# Altium PCB PCB1.PcbDoc
Units mil, origin at the board's own origin, x right, y up, seen from the top; angles counter-clockwise.
Board outline 6000 x 4000 mil, 2 copper layers (Top Layer, Bottom Layer); 69 components, 37 nets, 230 pads, 0 vias.
Unrouted connection lines stored in the file: 146.
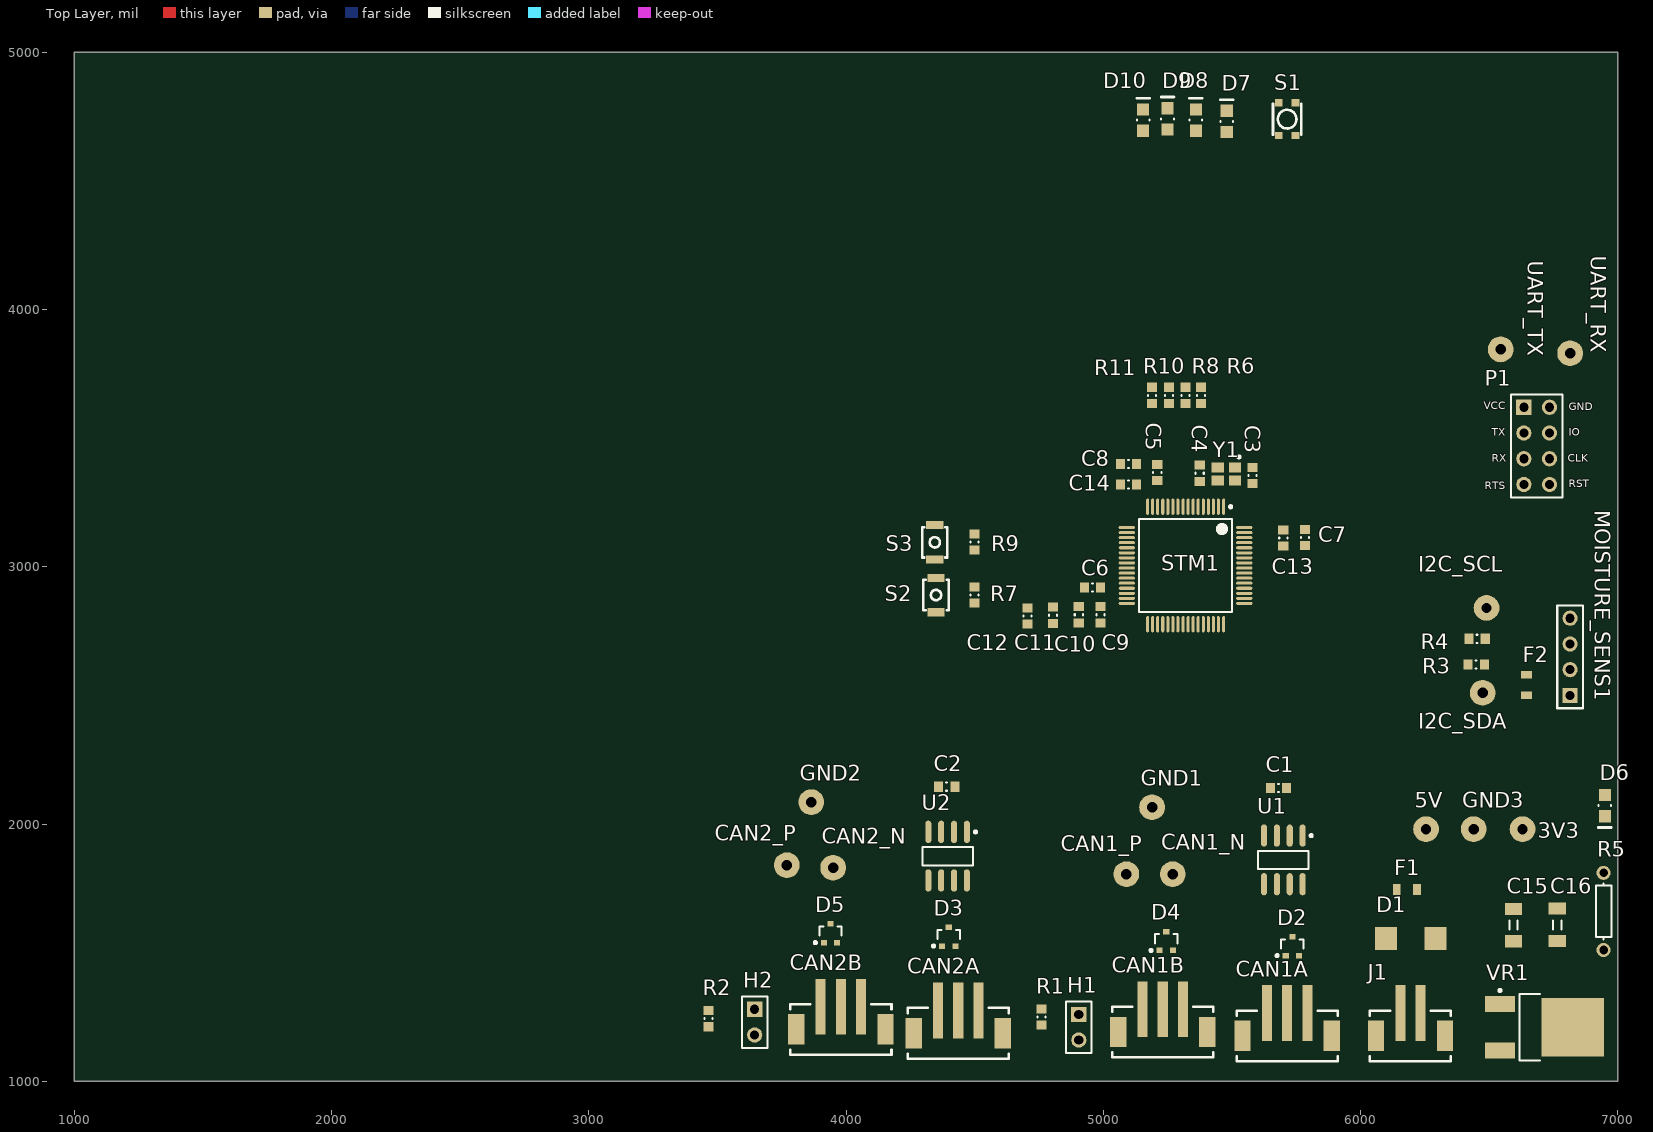
[diagram p0: Top Layer view]
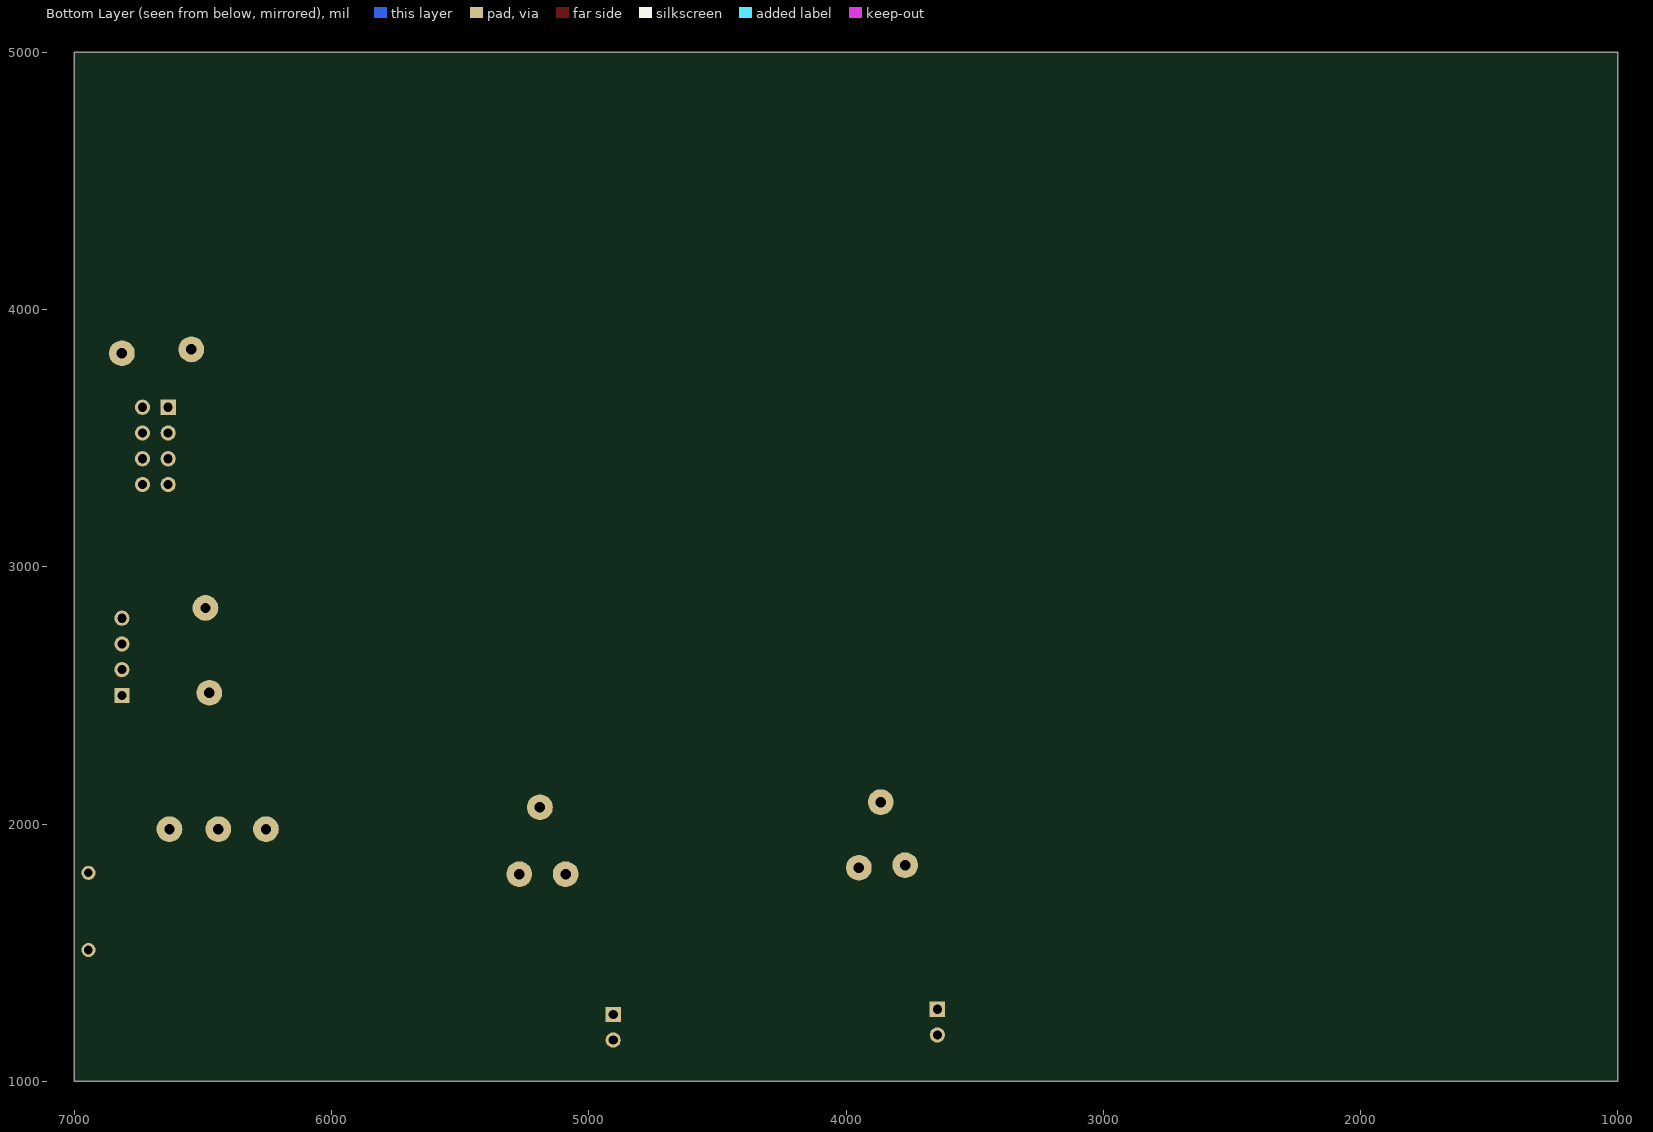
[diagram p1: Bottom Layer view, seen from below]

## Layer stack, top to bottom
Top Solder: solder mask 0.4, Solder Resist, Dk 3.5
Top Layer: signal copper 1.4
Dielectric 1: dielectric 12.6, FR-4, Dk 4.8
Bottom Layer: signal copper 1.4
Bottom Solder: solder mask 0.4, Solder Resist, Dk 3.5

## Board outline
1000,1000 7000,1000 7000,5000 1000,5000

## Design rules (kind name [scope] priority, off if disabled: settings)
BoardOutlineClearance [All] p1: gap=10 ignorepadtopadclearanceinfootprint=FALSE except(0: Arc-SplitContinuation Track-SplitContinuation SMDPad-SplitContinuation THPad-SplitContinuation Via-SplitContinuation Fill-SplitContinuation Poly-SplitContinuation Region-SplitContinuation Text-SplitContinuation)
Clearance [All] p1: gap=10 ignorepadtopadclearanceinfootprint=TRUE except(0: Arc-Hole Track-Hole SMDPad-Hole THPad-Hole Via-Hole Fill-Hole Poly-Hole Region-Hole Text-Hole; 6: Arc-Arc Arc-Track Arc-SMDPad Track-Track Track-SMDPad SMDPad-SMDPad)
HoleSize [All] p1: absolutevalues=TRUE maxlimit=244.09 minlimit=7.87 maxpercent=80.000 minpercent=20.000
MinimumAnnularRing [All] p1: minimumring=5.91
PolygonConnect [All] p1: connectstyle=Direct reliefconductorwidth=10 reliefentries=4 polygonreliefangle="90 Angle" airgapwidth=10
RoutingVias [All] p1: holewidth=16 width=28 viastyle="Through Hole" minholewidth=16 minwidth=28 maxholewidth=28 maxwidth=50
SolderMaskExpansion [All] p1: expansion=4
Width thicc [(InNet('-5V') OR InNet('+3V3') OR InNet('+5V'))] p1: maxlimit=20 minlimit=10 preferedwidth=15 minimp=50.000000 maximp=50.000000 favimp=50.000000
Width [All] p2: maxlimit=20 minlimit=4 preferedwidth=10 bottomlayer_minwidth=6 minimp=50.000000 maximp=50.000000 favimp=50.000000
29 further rules are at their usual default settings.

## Classes and differential pairs
component class Support: D7 D8 D9 D10 R6 R7 R8 R9 R10 R11 S2 S3
component class POWER: 3V3 5V C15 C16 D6 GND3 R5
component class MCU: C3 C4 C5 C6 C7 C8 C9 C10 C11 C12 C13 C14 I2C_SCL I2C_SDA R3 R4 S1 STM1 UART_RX UART_TX Y1
component class Connectors: CAN1A CAN1B CAN2A CAN2B D1 D2 D3 D4 D5 F1 F2 J1 MOISTURE_SENS1 P1
component class CAN: C1 C2 CAN1_N CAN1_P CAN2_N CAN2_P GND1 GND2 H1 H2 R1 R2 U1 U2

## Components (designator, comment, footprint, x,y, rotation, side; value= is the part's Value field where it differs from the comment)
3V3 "TESTPOINT_LOOP" TESTPOINT_LOOP 6630,1980 r180 top
5V "TESTPOINT_LOOP" TESTPOINT_LOOP 6255,1980 r180 top
C1 "CAP_0.1uF_16V_0603" CAPC0603(1608)55_N 5681.5,2140 r180 top value=0.1uF
C2 "CAP_0.1uF_16V_0603" CAPC0603(1608)55_N 4391.5,2145 r180 top value=0.1uF
C3 "CAP_15pF_0603" CAPC0603(1608)55_N 5580,3355 r90 top value=15pF
C4 "CAP_15pF_0603" CAPC0603(1608)55_N 5375,3363.5 r270 top value=15pF
C5 "CAP_0.1uF_16V_0603" CAPC0603(1608)55_N 5210,3366.5 r270 top value=0.1uF
C6 "CAP_4.7uF_0603" CAPC0603(1608)55_N 4958.5,2920 r0 top value=4.7uF
C7 "CAP_0.1uF_16V_0603" CAPC0603(1608)55_N 5785,3113.5 r90 top value=0.1uF
C8 "CAP_1uF_16V_0603" CAPC0603(1608)55_N 5098.5,3400 r0 top value=1uF
C9 "CAP_0.1uF_16V_0603" CAPC0603(1608)55_N 4990,2813.5 r90 top value=0.1uF
C10 "CAP_0.1uF_16V_0603" CAPC0603(1608)55_N 4905,2813.5 r90 top value=0.1uF
C11 "CAP_0.1uF_16V_0603" CAPC0603(1608)55_N 4805,2811.5 r90 top value=0.1uF
C12 "CAP_4.7uF_0603" CAPC0603(1608)55_N 4705,2808.5 r90 top value=4.7uF
C13 "CAP_0.1uF_16V_0603" CAPC0603(1608)55_N 5700,3111.5 r90 top value=0.1uF
C14 "CAP_10nF_0603" CAPC0603(1608)55_N 5098.5,3320 r0 top value=10nF
C15 "10uF" CAPC1206(3216) 6595,1607.01 r90 top
C16 "10uF" CAPC1206(3216) 6765,1607.99 r90 top
CAN1_N "TESTPOINT_LOOP" TESTPOINT_LOOP 5270,1805 r270 top
CAN1_P "TESTPOINT_LOOP" TESTPOINT_LOOP 5090,1805 r270 top
CAN1A "CON_3M_SM4" JST-B3B-SM4-TB 5715,1077.99 r0 top
CAN1B "CON_3M_SM4" JST-B3B-SM4-TB 5231.26,1092.99 r0 top
CAN2_N "TESTPOINT_LOOP" TESTPOINT_LOOP 3950,1830 r270 top
CAN2_P "TESTPOINT_LOOP" TESTPOINT_LOOP 3770,1840 r270 top
CAN2A "CON_3M_SM4" JST-B3B-SM4-TB 4436.26,1087.99 r0 top
CAN2B "CON_3M_SM4" JST-B3B-SM4-TB 3980,1102.99 r0 top
D1 "TVS_DIODE_BIDIRECTIONAL" TVS_DIODE_BIDIRECTIONAL 6195,1555 r0 top
D2 "TVS_DIODE_CAN" NXP-SOT323-3 5735,1525 r90 top
D3 "TVS_DIODE_CAN" NXP-SOT323-3 4399.41,1561.42 r90 top
D4 "TVS_DIODE_CAN" NXP-SOT323-3 5245,1545 r90 top
D5 "TVS_DIODE_CAN" NXP-SOT323-3 3940,1575 r90 top
D6 "DIO_LED_G" LED_0805_LINE 6950,2071.34 r270 top
D7 "DIO_LED_Y" LED_0805_LINE 5480,4731.34 r90 top
D8 "DIO_LED_G" LED_0805_LINE 5360,4736.34 r90 top
D9 "DIO_LED_G" LED_0805_LINE 5250,4741.34 r90 top
D10 "DIO_LED_G" LED_0805_LINE 5155,4736.34 r90 top
F1 "FUSE_2A_0603" FUSE_0603 6180.43,1745 r0 top
F2 "FUSE_250mA_0603" FUSE_0603 6645,2540.43 r90 top
GND1 "GND" TESTPOINT_LOOP 5190,2065 r270 top
GND2 "TESTPOINT_LOOP" TESTPOINT_LOOP 3865,2085 r270 top
GND3 "TESTPOINT_LOOP" TESTPOINT_LOOP 6440,1980 r270 top
H1 "JUMPER_2" HDR1X2 4905,1260 r270 top
H2 "JUMPER_2" HDR1X2 3645,1280 r270 top
I2C_SCL "TESTPOINT_LOOP" TESTPOINT_LOOP 6490,2840 r90 top
I2C_SDA "TESTPOINT_LOOP" TESTPOINT_LOOP 6475,2510 r180 top
J1 "CON_2M_SM4" JST-B2B-SM4-TB 6194.37,1077.99 r0 top
MOISTURE_SENS1 "Header 4" HDR1X4 6815,2500 r90 top
P1 "HEADER 4X2" HEADER_2X4 6635,3620 r270 top
R1 "RES_120R_0603" RESC0603(1608)_N 4760,1250 r90 top value=120R
R2 "RES_120R_0603" RESC0603(1608)_N 3465,1243.5 r90 top value=120R
R3 "RES_4K7_0603" RESC0603(1608)_N 6450,2620 r180 top value=4K7
R4 "RES_4K7_0603" RESC0603(1608)_N 6453.5,2720 r180 top value=4K7
R5 "Res1" AXIAL-0.3 6945,1660 r270 top value=100R
R6 "RES_100R_0603" RESC0603(1608)_N 5380,3666.5 r90 top value=100R
R7 "RES_10K_0603" RESC0603(1608)_N 4500,2890 r90 top value=10K
R8 "RES_100R_0603" RESC0603(1608)_N 5320,3666.5 r90 top value=100R
R9 "RES_10K_0603" RESC0603(1608)_N 4500,3096.5 r270 top value=10K
R10 "RES_100R_0603" RESC0603(1608)_N 5255,3666.5 r90 top value=100R
R11 "RES_100R_0603" RESC0603(1608)_N 5190,3666.5 r90 top value=100R
S1 "SW_PWR" PTS830GM140 5715,4740 r270 top
S2 "SW_TACTILE" B3U-1100P 4350,2890 r270 top
S3 "SW_TACTILE" B3U-1100P 4345,3095 r270 top
STM1 "STM32F446RET6" STM-LQFP64_L 5320,3005 r270 top
U1 "IC TXRX CAN" LT-S8_N 5700,1860.51 r270 top
U2 "IC TXRX CAN" LT-S8_N 4395,1875 r270 top
UART_RX "TESTPOINT_LOOP" TESTPOINT_LOOP 6815,3830 r90 top
UART_TX "TESTPOINT_LOOP" TESTPOINT_LOOP 6545,3845 r90 top
VR1 "5V0_3V3_LDO" VOLTAGE_REGULATOR 6652.17,1210 r270 top
Y1 "CRYSTAL_32MHZ" AVX-CX2520DB32000D0GEJZ1-4_V 5478.46,3360.59 r270 top

## Footprints (in the part's own frame and the unit in brackets; to place one, negate y for a bottom-side part, rotate by r counter-clockwise, add the part's x,y. Pads: shape width x height; smd on the part's side, far side on the other; paste and mask are expansions set on the pad)
AVX-CX2520DB32000D0GEJZ1-4_V [mm] "Hand Drawn, 4-Leads,Body 2.5x2mm"
  rect 1x1.2 smd: 1(-0.65,0.85) 2(-0.65,-0.85) 3(0.65,-0.85) 4(0.65,0.85)
  silkscreen extent -1.82,1.13 -1.58,1.38, body extent -1,-1.25 1,1.25, height 0.55
AXIAL-0.3 [mm] "Axial Device, Thru-Hole; 2 Leads; 0.3 in Pin Spacing"
  round 1.4 hole 0.85: 1(-3.81,0) 2(3.81,0)
  silkscreen extent -2.77,-0.76 2.77,0.76
B3U-1100P [mm] "TACTILE SWITCH GREY"
  rect 0.8x1.7 smd: 1(-1.7,0) 2(1.7,0)
  silkscreen extent -1.5,-1.25 1.5,1.25, body extent -2,-1.25 2,1.25, height 1.6
CAPC0603(1608)55_N [mm] "Chip Capacitor, Body 1.6x0.8mm, Height 0.55mm, IPC Medium Density"
  rect 0.9x1 smd: 1(-0.8,0) 2(0.8,0)
  silkscreen extent -0.05,-0.4 0.05,0.4, body extent -0.87,-0.48 0.88,0.47, height 0.55
CAPC1206(3216) [mm] "Chip Capacitor, Body 3.2x1.6mm, Height 0.55mm, IPC Medium Density"
  rect 1.2x1.7 smd: 1(-1.6,0) 2(1.6,0)
  silkscreen extent -0.45,-0.4 0.45,0.4, body extent -1.6,-0.85 1.6,0.85, height 1.75
FUSE_0603 [mm] "Chip Fuse, Body 1.6x0.81mm"
  rect 0.762x1.09 smd: 1(-1.005,0) 2(1.005,0)
  body extent -0.8,-0.38 0.8,0.38, height 0.75
HDR1X2 [mm] "Connector; Header; 2 Position"
  rect 1.5x1.5 hole 0.9: 1(0,0)
  round 1.5 hole 0.9: 2(2.54,0)
  silkscreen extent -1.27,-1.27 3.81,1.27, body extent -1.27,-1.27 3.81,1.27, height 6.35
HDR1X4 [mm] "Connector; Header; 4 Position"
  rect 1.5x1.5 hole 0.9: 1(0,0)
  round 1.5 hole 0.9: 2(2.54,0) 3(5.08,0) 4(7.62,0)
  silkscreen extent -1.27,-1.27 8.89,1.27
HEADER_2X4 [mm]
  rect 1.5x1.5 hole 0.9: 1(0,0)
  round 1.5 hole 0.9: 2(2.54,0) 3(5.08,0) 4(7.62,0) 5(0,2.54) 6(2.54,2.54) 7(5.08,2.54) 8(7.62,2.54)
  silkscreen extent -1.27,-1.27 8.89,3.81, body extent -1.36,-1.32 8.8,3.67, height 8.54
JST-B2B-SM4-TB [mm]
  rect 1x5.5 smd: 1(-1,4.75) 2(1,4.75)
  rect 1.6x3 smd: 3(-3.4,2.5) 4(3.4,2.5)
  silkscreen extent -4,0 4,5, body extent -3.97,0 3.97,7, height 6.6
JST-B3B-SM4-TB [mm]
  rect 1x5.5 smd: 1(-2,4.75) 2(0,4.75) 3(2,4.75)
  rect 1.6x3 smd: 4(-4.4,2.5) 5(4.4,2.5)
  silkscreen extent -5,0 5,5, body extent -4.97,0 4.97,7, height 6.6
LED_0805_LINE [mm] "SMD, 2-Leads, Body 2x1.25mm"
  rect 1.2x1.2 smd: 1(-1.05,0) 2(1.05,0)
  silkscreen extent -0.05,-0.63 2.16,0.64, body extent -1,-0.63 1,0.63, height 0.8
LT-S8_N [mm] "SOP, 8-Leads, Body 4.9x3.9mm, Pitch 1.27mm, IPC Medium Density"
  oval 2.2x0.6 smd: 1(-2.4,1.905) 2(-2.4,0.635) 3(-2.4,-0.635) 4(-2.4,-1.905) 5(2.4,-1.905) 6(2.4,-0.635) 7(2.4,0.635) 8(2.4,1.905)
  silkscreen extent -2.52,-2.5 0.9,2.88, body extent -2,-2.5 2,2.5, height 1.76
NXP-SOT323-3 [mm] "SOT23, 3-Leads, Body 2.2x1.35mm, Pitch 0.65mm"
  rect 0.55x0.6 smd paste-1: 1(-0.925,0.65) 2(-0.925,-0.65) 3(0.925,0)
  silkscreen extent -1.05,-1.1 0.67,1.62, body extent -1.15,-1.1 1.15,1.1, height 1.1
PTS830GM140 [mm] "PWR TACTILE SWITCH (RED)"
  rect 0.7x0.75 smd: 1(-1.625,0.825) 2(1.625,0.825) 3(-1.625,-0.825) 4(1.625,-0.825)
  silkscreen extent -1.53,-1.4 1.53,1.4, body extent -1.75,-1.3 1.75,1.3, height 1.35
RESC0603(1608)_N [mm] "Chip Resistor, Body 1.6x0.8mm, IPC Medium Density"
  rect 0.9x1 smd: 1(-0.8,0) 2(0.8,0)
  silkscreen extent -0.05,-0.4 0.05,0.4, body extent -0.85,-0.47 0.85,0.47, height 0.6
STM-LQFP64_L [mm] "QFP, 64-Leads, Body 10x10mm, Pitch 0.5mm, IPC High Density"
  oval 1.6x0.3 smd: 1(-5.8,3.75) 2(-5.8,3.25) 3(-5.8,2.75) 4(-5.8,2.25) 5(-5.8,1.75) 6(-5.8,1.25) 7(-5.8,0.75) 8(-5.8,0.25) 9(-5.8,-0.25) 10(-5.8,-0.75) 11(-5.8,-1.25) 12(-5.8,-1.75) 13(-5.8,-2.25) 14(-5.8,-2.75) 15(-5.8,-3.25) 16(-5.8,-3.75) 33(5.8,-3.75) 34(5.8,-3.25) 35(5.8,-2.75) 36(5.8,-2.25) 37(5.8,-1.75) 38(5.8,-1.25) 39(5.8,-0.75) 40(5.8,-0.25) 41(5.8,0.25) 42(5.8,0.75) 43(5.8,1.25) 44(5.8,1.75) 45(5.8,2.25) 46(5.8,2.75) 47(5.8,3.25) 48(5.8,3.75)
  oval 0.3x1.6 smd: 17(-3.75,-5.8) 18(-3.25,-5.8) 19(-2.75,-5.8) 20(-2.25,-5.8) 21(-1.75,-5.8) 22(-1.25,-5.8) 23(-0.75,-5.8) 24(-0.25,-5.8) 25(0.25,-5.8) 26(0.75,-5.8) 27(1.25,-5.8) 28(1.75,-5.8) 29(2.25,-5.8) 30(2.75,-5.8) 31(3.25,-5.8) 32(3.75,-5.8) 49(3.75,5.8) 50(3.25,5.8) 51(2.75,5.8) 52(2.25,5.8) 53(1.75,5.8) 54(1.25,5.8) 55(0.75,5.8) 56(0.25,5.8) 57(-0.25,5.8) 58(-0.75,5.8) 59(-1.25,5.8) 60(-1.75,5.8) 61(-2.25,5.8) 62(-2.75,5.8) 63(-3.25,5.8) 64(-3.75,5.8)
  silkscreen extent -5.92,-4.6 4.6,4.6, body extent -5,-5 5,5, height 1.6
TESTPOINT_LOOP [mm]
  round 2.54 hole 1.02: 1(0,0)
  body extent -1.27,-1.27 1.27,1.27, height 4.57
TVS_DIODE_BIDIRECTIONAL [mm]
  rect 2.16x2.26 smd: 1(-2.45,0) 2(2.45,0)
  body extent -2.7,-1.8 2.7,1.8, height 2.27
VOLTAGE_REGULATOR [mm] "DPAK, 3-Leads, Body 6.095x6.54mm, Pitch 4.57mm"
  rect 1.6x3 smd: 1(-2.285,-2.79) 3(2.285,-2.79)
  rect 5.8x6.2 smd: 2(0,4.39)
  silkscreen extent -3.76,-2.91 3.27,1.14, body extent -3.27,-0.84 3.27,5.25, height 2.38

## Part data
3V3 5V CAN1_N CAN1_P CAN2_N CAN2_P GND2 GND3 I2C_SCL I2C_SDA UART_RX UART_TX: "Loop testpoint through-hole pad", Manufacturer="Keystone Electronics", Manufacturer Part Number 1=5002, Supplier Part Number 1=36-5002-ND, Supplier 1=Digi-Key
C1 C2 C5 C7 C9 C10 C11 C13: "CAP CER 0.1UF 16V X7R 0603", Manufacturer=Yageo, MPN=CC0603KRX7R7BB104, Package="0603 (1608 Metric)", Supplier Part Number 1=311-1088-1-ND, Temperature Coefficient=X7R, Voltage Rating=16V, Dimensions="0.063\" L x 0.031\" W (1.60mm x 0.80mm)", Supplier 1=Digi-Key
C3 C4: "CAP CER 15PF 250V NPO 0603", Manufacturer=Yageo, MPN=AC0603JRNPOYBN150, Package="0603 (1608 Metric)", Supplier Part Number 1=311-3282-1-ND, Temperature Coefficient=NP0, Voltage Rating=250V, Dimensions="0.063\" L x 0.031\" W (1.60mm x 0.80mm)", Supplier 1=Digi-Key
C6 C12: "CAP CER 4.7UF 6.3V X5R 0603", Manufacturer=Yageo, MPN=CC0603KRX5R5BB475, Package="0603 (1608 Metric)", Supplier Part Number 1=311-1521-1-ND, Temperature Coefficient=X5R, Voltage Rating=6.3V, Dimensions="0.063\" L x 0.031\" W (1.60mm x 0.80mm)", Supplier 1=Digi-Key
C8: "CAP CER 1UF 16V Y5V 0603", Manufacturer=Yageo, MPN=CC0603ZRY5V7BB105, Package="0603 (1608 Metric)", Supplier Part Number 1=311-1372-1-ND, Temperature Coefficient=Y5V, Voltage Rating=16V, Dimensions="0.063\" L x 0.031\" W (1.60mm x 0.80mm)", Supplier 1=Digi-Key
C14: "CAP CER 10000PF 16V X7R 0603", Manufacturer=Yageo, MPN=CC0603KRX7R7BB103, Package="0603 (1608 Metric)", Supplier Part Number 1=311-3369-1-ND, Temperature Coefficient=X7R, Voltage Rating=16V, Dimensions="0.063\" L x 0.031\" W (1.60mm x 0.80mm)", Supplier 1=Digi-Key
C15 C16: library part CAP_10uF_50V_1206, "CAP CER 10UF 50V X5R 1206", Manufacturer=Murata, MPN=GRT31CR61H106KE01L, Package="1206 (3216 Metric)", Supplier Part Number 1=490-12456-1-ND, Voltage Rating=50V, Dimensions="0.126\" L x 0.063\" W (3.20mm x 1.6mm)", Supplier 1=Digi-Key
CAN1A CAN1B CAN2A CAN2B: Manufacturer=JST, Manufacturer Part Number=B3B-PH-SM4-TB(LF)(SN), Max Current Rating=2A, Max Voltage Rating=100V, Supplier Part Number 1=455-1735-1-ND, ComponentLink1Description=https://datasheet.ciiva.com/11747/0900766b80ddea81-11747684.pdf?src-supplier=RSComponents, ComponentLink1URL=https://datasheet.ciiva.com/11747/0900766b80ddea81-11747684.pdf?src-supplier=RSComponents, Pitch=2mm, Supplier 1=Digi-Key
D1: "TVS DIODE 5V 9.2V DO214AA", Breakdown Voltage=6.4V, Case/Package=SMB, Clamping Voltage=9.2V, Leakage Current=1.6mA, Manufacturer="Nexperia USA Inc.", Manufacturer 1=Littelfuse, Manufacturer Part Number 1=SMBJ5.0CA, Max Breakdown Voltage=7V, Max Operating Temperature=150°C, Max Power Dissipation=5W, Max Surge Current=65.3A, Min Operating Temperature=-65°C, MPN=PESD2CAN,215, Operating Supply Voltage=5V, Package="SC-70, SOT-323", Package Quantity=3000, Peak Pulse Power=600W, Power Line Protection=No, Supplier Part Number 1=1727-3891-1-ND, Test Current=10mA, ComponentLink1Description=Datasheet, ComponentLink1URL=https://www.littelfuse.com/~/media/electronics/datasheets/tvs_diodes/littelfuse_tvs_diode_smbj_datasheet.pdf.pdf, Composition=Zener, Direction=Bidirectional, Element Configuration=Single, ESD Protection=Yes, Height=0.096inch, Lead Free="Lead Free", Length=0.179inch, Max Reverse Leakage Current=1.6mA, Min Breakdown Voltage=6.4V, Mount="Surface Mount", Number of Bidirectional Channels=1, Number of Channels=1, Number of Elements=1, Number of Pins=2, Packaging="Tape and Reel", Peak Pulse Current=65.3A, Polarity=Bidirectional, Power Dissipation=600W, Pricing 1="1=0.39000, 10=0.31300, 25=0.28640, 100=0.17980, 250=0.17784, 500=0.16650, 1000=0.11322 (USD)", Radiation Hardening=No, REACH SVHC="No SVHC", Reverse Breakdown Voltage=6.4V, Reverse Standoff Voltage=5V, Stock 1=23233, Supplier 1=Digi-Key, Termination=SMD/SMT, Voltage Rating (DC)=5V, Width=0.155inch
D2 D3 D4 D5: "TVS DIODE 24V 41V SOT323-3", Manufacturer="Nexperia USA Inc.", Manufacturer Part Number=PESD2CAN,215, Package="SC-70, SOT-323", Supplier Part Number 1=1727-3891-1-ND, ComponentLink1Description=Datasheet, ComponentLink1URL=https://assets.nexperia.com/documents/data-sheet/PESD1CAN-U.pdf, Supplier 1=Digi-Key
D6 D8 D9 D10: "LED GREEN DIFFUSED 0805 SMD", Forward Voltage Drop=2.2V, Manufacturer=OSRAM, MPN="LG R971-KN-1", Package="0805 (2012 Metric)", Supplier Part Number 1=475-1410-1-ND, Supplier 1=Digi-Key
D7: "LED YELLOW DIFFUSED 0805 SMD", Forward Voltage Drop=2.2V, Manufacturer=OSRAM, MPN="LY R976-PS-36", Package="0805 (2012 Metric)", Supplier Part Number 1=475-2560-1-ND, Supplier 1=Digi-Key
F1: "FUSE SMD 2A 32V", Current Rating=2A, Supplier Part Number 1=F7132CT-ND, Voltage Rating (AC)=32V, ComponentLink1Description=https://datasheet.ciiva.com/303/467-303400.pdf?src-supplier=Digi-Key, ComponentLink1URL=https://datasheet.ciiva.com/303/467-303400.pdf?src-supplier=Digi-Key, ComponentLink2Description=http://datasheet.octopart.com/0467002.NRHF-Littelfuse-datasheet-32023482.pdf?src-supplier=Future+Electronics, ComponentLink2URL=http://datasheet.octopart.com/0467002.NRHF-Littelfuse-datasheet-32023482.pdf?src-supplier=Future+Electronics, ComponentLink3Description=http://datasheet.octopart.com/0467002.NRHF-Littelfuse-datasheet-136509808.pdf?src-supplier=Future+Electronics, ComponentLink3URL=http://datasheet.octopart.com/0467002.NRHF-Littelfuse-datasheet-136509808.pdf?src-supplier=Future+Electronics, Mount="Surface Mount", Supplier 1=Digi-Key, Supplier Packaging 1="Cut Tape", Voltage Rating (DC)=32V
F2: "FUSE SMD 250mA 32V", Current Rating=250mA, Supplier Part Number 1=F6020CT-ND, Voltage Rating (AC)=32V, ComponentLink1Description=https://datasheet.ciiva.com/303/467-303396.pdf?src-supplier=Digi-Key, ComponentLink1URL=https://datasheet.ciiva.com/303/467-303396.pdf?src-supplier=Digi-Key, ComponentLink2Description=https://datasheet.ciiva.com/18652/littelfuse-fuse-467-datasheet-pdf-18652490.pdf?src-supplier=Digi-Key, ComponentLink2URL=https://datasheet.ciiva.com/18652/littelfuse-fuse-467-datasheet-pdf-18652490.pdf?src-supplier=Digi-Key, ComponentLink3Description=https://datasheet.ciiva.com/18652/littelfuse-fuse-467-datasheet-pdf-18652491.pdf?src-supplier=Digi-Key, ComponentLink3URL=https://datasheet.ciiva.com/18652/littelfuse-fuse-467-datasheet-pdf-18652491.pdf?src-supplier=Digi-Key, ComponentLink4Description=https://datasheet.ciiva.com/18652/littelfuse-fuse-467-datasheet-pdf-18652492.pdf?src-supplier=Digi-Key, ComponentLink4URL=https://datasheet.ciiva.com/18652/littelfuse-fuse-467-datasheet-pdf-18652492.pdf?src-supplier=Digi-Key, Mount="Surface Mount", Supplier 1=Digi-Key, Supplier Packaging 1="Cut Tape", Voltage Rating (DC)=32V
GND1: library part TESTPOINT_LOOP, "Loop testpoint through-hole pad", Manufacturer="Keystone Electronics", Manufacturer Part Number 1=5002, Supplier Part Number 1=36-5002-ND, Supplier 1=Digi-Key
H1 H2: "HEADER 2X1"
J1: Manufacturer=JST, Manufacturer Part Number=B2B-PH-SM4-TB(LF)(SN), Max Current Rating=2A, Max Voltage Rating=100V, Supplier Part Number 1=455-1734-1-ND, ComponentLink1Description=https://datasheet.ciiva.com/11748/0900766b80ddea81-11748001.pdf?src-supplier=RSComponents, ComponentLink1URL=https://datasheet.ciiva.com/11748/0900766b80ddea81-11748001.pdf?src-supplier=RSComponents, ComponentLink2Description=https://datasheet.ciiva.com/16216/b2b-ph-sm4-tblfsn-16216102.pdf?src-supplier=Future+Electronics, ComponentLink2URL=https://datasheet.ciiva.com/16216/b2b-ph-sm4-tblfsn-16216102.pdf?src-supplier=Future+Electronics, ComponentLink3Description=https://datasheet.ciiva.com/8052/80567-8052023.pdf?src-supplier=Element14, ComponentLink3URL=https://datasheet.ciiva.com/8052/80567-8052023.pdf?src-supplier=Element14, ComponentLink4Description=https://datasheet.ciiva.com/712/eph-712504.pdf?src-supplier=Digi-Key, ComponentLink4URL=https://datasheet.ciiva.com/712/eph-712504.pdf?src-supplier=Digi-Key, ComponentLink5Description=https://datasheet.ciiva.com/712/eph-712505.pdf?src-supplier=Digi-Key, ComponentLink5URL=https://datasheet.ciiva.com/712/eph-712505.pdf?src-supplier=Digi-Key, ComponentLink6Description=https://datasheet.ciiva.com/712/eph-712506.pdf?src-supplier=Digi-Key, ComponentLink6URL=https://datasheet.ciiva.com/712/eph-712506.pdf?src-supplier=Digi-Key, Pitch=2mm, Supplier 1=Digi-Key
MOISTURE_SENS1: "Header, 4-Pin", LatestRevisionDate=17-Jul-2002, LatestRevisionNote="Re-released for DXP Platform.", Publisher="Altium Limited"
P1: "Header, 4-Pin Dual row", Manufacturer="Sullins Connector Solutions", MPN=GRPB042VWVN-RC, Supplier Part Number 1=S9015E-04-ND, Supplier 1=Digi-Key
R1 R2: "RES SMD 120 OHM 5% 1/10W 0603", Manufacturer=Yageo, MPN=RC0603JR-07120RL, Package="0603 (1608 Metric)", Supplier Part Number 1=311-120GRCT-ND, Tolerance=5%, Dimensions="0.063\" L x 0.031\" W (1.60mm x 0.80mm)", Supplier 1=Digi-Key
R3 R4: "RES SMD 4.7K OHM 5% 1/10W 0603", Manufacturer=Yageo, MPN=RC0603JR-074K7L, Package="0603 (1608 Metric)", Supplier Part Number 1=311-4.7KGRCT-ND, Tolerance=5%, Dimensions="0.063\" L x 0.031\" W (1.60mm x 0.80mm)", Supplier 1=Digi-Key
R5: "Resistor", LatestRevisionDate=17-Jul-2002, LatestRevisionNote="Re-released for DXP Platform.", PackageDescription="Axial Device, Thru-Hole; 2 Leads; 0.3 in Pin Spacing", PackageReference=AXIAL-0.3, Published=8-Jun-2000, Publisher="Altium Limited"
R6 R8 R10 R11: "RES SMD 100 OHM 1% 1/10W 0603", Manufacturer=Yageo, MPN=RC0603FR-07100RL, Package="0603 (1608 Metric)", Supplier Part Number 1=311-100HRCT-ND, Tolerance=1%, Dimensions="0.063\" L x 0.031\" W (1.60mm x 0.80mm)", Supplier 1=Digi-Key
R7 R9: "RES SMD 10K OHM 5% 1/10W 0603", Manufacturer=Yageo, MPN=RC0603JR-0710KL, Package="0603 (1608 Metric)", Supplier Part Number 1=311-10KGRCT-ND, Tolerance=5%, Dimensions="0.063\" L x 0.031\" W (1.60mm x 0.80mm)", Supplier 1=Digi-Key
S1: "Power Switch (Red)", Manufacturer=C&K, MPN="PTS830GM140 SMTR LFS", Supplier Part Number 1=CKN10587CT-ND, ComponentLink1Description=Datasheet, ComponentLink1URL=https://www.ckswitches.com/media/1478/pts830.pdf, Supplier 1=Digi-Key
S2 S3: "Tactile Switch (Grey)", Manufacturer="Omron Electronics Inc-EMC Div", MPN=B3U-1100P, Supplier Part Number 1=SW1021TR-ND, Supplier 1=Digi-Key
STM1: library part MCU_STM32F446RET6, "ARM Cortex-M4 32-bit MCU+FPU, 512 KB Flash, 128 KB Internal RAM, 50 I/Os, 64-Pin LQFP, -40 to 85 degC, Tray", I/Os (High Current)=50, Operating Frequency(F) (Processor speed) (MHz)=180, Package Description=LQFP64, Package Reference="64-Pin Low-profile Quad Flat Package, Body 10 x 10 mm, Pitch 0.5 mm", Supply Voltage(Vcc) min (V)=1.7, ComponentLink1Description="Manufacturer URL", ComponentLink1URL=http://www.st.com/, ComponentLink2Description=Datasheet, ComponentLink2URL=http://www.st.com/st-web-ui/static/active/en/resource/technical/document/datasheet/DM00141306.pdf, Core="ARM Cortex-M4", D/A Converter=2, DatasheetVersion="Rev. 6", FLASH Size (Prog) (kB)=512, Internal RAM Size (kB)=128, Mounting Technology="Surface Mount", Packing=Tray
U1 U2: library part LTC2875, "IC TXRX CAN 4MBPS 8SO", Manufacturer="Linear Technologies", MPN=LTC2875IS8#PBF, Package="8-SOIC (0.154\", 3.90mm Width)", Supplier Part Number 1=LTC2875IS8#PBF-ND, ComponentLink1Description=Datasheet, ComponentLink1URL=https://www.analog.com/media/en/technical-documentation/data-sheets/2875f.pdf, Supplier 1=Digi-Key
VR1: "IC REG LINEAR 3.3V 1A DPAK", Current Output=1A, Manufacturer="ON Semiconductor", MPN=NCP1117DT33T5G, Supplier Part Number 1=NCP1117DT33T5GOSCT-ND, Supplier 1=Digi-Key
Y1: "CRYSTAL 32MHZ 8PF SMD", Manufacturer="Kyocera International Inc. Electronic Components", MPN=CX2520DB32000D0GPSC1, Package="4-SMD, No Lead", Supplier Part Number 1=1253-1730-1-ND, ComponentLink1Description=Datasheet, ComponentLink1URL=https://media.digikey.com/pdf/Data%20Sheets/AVX%20PDFs/CX2520DB_USY1M-H1-16428-00_Spec.pdf, Dimensions="0.098\" L x 0.079\" W (2.50mm x 2.00mm)", Supplier 1=Digi-Key

## Nets (pads, with @x,y where several pads share a name; then routed paths per layer and width w, separated by ;. In a path a pad name is that pad's centre, name@x,y a point inside that pad or via, vN(x,y) a via of type N, cw(c..) or ccw(c..) an arc to the next point about the centre after c; other vN are vias at no path point)
+3V3: 3V3.1 C1.2 C2.2 C7.2 C8.2 C9.2 C10.2 C11.2 C12.2 C13.2 C14.2 C16.1 F2.1 P1.1 R3.2 R4.2 R5.2 R7.1 R9.2 STM1.1 STM1.13 STM1.19 STM1.32 STM1.48 STM1.64 U1.3 U2.3 VR1.2
+5V: 5V.1 C15.1 F1.2 VR1.3
GND: C1.1 C2.1 C3.1 C4.1 C5.1 C6.1 C7.1 C8.1 C9.1 C10.1 C11.1 C12.1 C13.1 C14.1 C15.2 C16.2 CAN1A.3 CAN1B.3 CAN2A.3 CAN2B.3 D1.2 D2.3 D3.3 D4.3 D5.3 D6.2 D7.2 D8.2 D9.2 D10.2 GND1.1 GND2.1 GND3.1 J1.2 MOISTURE_SENS1.1 P1.5 S1.1 S2.2 S3.2 STM1.12 STM1.18 STM1.31 STM1.47 STM1.63 U1.2 U1.8 U2.2 U2.8 VR1.1 Y1.2
NetC3_2: C3.2 STM1.6 Y1.1
NetC4_2: C4.2 STM1.5 Y1.3
NetC5_2: C5.2 P1.8 S1.4 STM1.7
NetC6_2: C6.2 STM1.30
NetCAN1_N_1: CAN1_N.1 CAN1A.2 CAN1B.2 D2.1 D4.1 H1.2 U1.6
NetCAN1_P_1: CAN1_P.1 CAN1A.1 CAN1B.1 D2.2 D4.2 R1.1 U1.7
NetCAN2_N_1: CAN2_N.1 CAN2A.2 CAN2B.2 D3.1 D5.1 H2.2 U2.6
NetCAN2_P_1: CAN2_P.1 CAN2A.1 CAN2B.1 D3.2 D5.2 R2.1 U2.7
NetD1_1: D1.1 F1.1 J1.1
NetD6_1: D6.1 R5.1
NetD7_1: D7.1 R6.2
NetD8_1: D8.1 R8.2
NetD9_1: D9.1 R10.2
NetD10_1: D10.1 R11.2
NetF2_2: F2.2 MOISTURE_SENS1.2
NetH1_1: H1.1 R1.2
NetH2_1: H2.1 R2.2
NetI2C_SCL_1: I2C_SCL.1 MOISTURE_SENS1.4 R4.1 STM1.41
NetI2C_SDA_1: I2C_SDA.1 MOISTURE_SENS1.3 R3.1 STM1.40
NetP1_2: P1.2 STM1.51 UART_TX.1
NetP1_3: P1.3 STM1.52 UART_RX.1
NetP1_4: P1.4 STM1.50
NetP1_6: P1.6 STM1.46
NetP1_7: P1.7 STM1.49
NetR6_1: R6.1 STM1.8
NetR7_2: R7.2 S2.1 STM1.26
NetR8_1: R8.1 STM1.9
NetR9_1: R9.1 S3.1 STM1.27
NetR10_1: R10.1 STM1.10
NetR11_1: R11.1 STM1.11
NetSTM1_33: STM1.33 U2.4
NetSTM1_34: STM1.34 U2.1
NetSTM1_44: STM1.44 U1.4
NetSTM1_45: STM1.45 U1.1
pads on no net: CAN1A.4 CAN1A.5 CAN1B.4 CAN1B.5 CAN2A.4 CAN2A.5 CAN2B.4 CAN2B.5 J1.3 J1.4 S1.2 S1.3 STM1.2 STM1.3 STM1.4 STM1.14 STM1.15 STM1.16 STM1.17 STM1.20 STM1.21 STM1.22 STM1.23 STM1.24 STM1.25 STM1.28 STM1.29 STM1.35 STM1.36 STM1.37 STM1.38 STM1.39 STM1.42 STM1.43 STM1.53 STM1.54 STM1.55 STM1.56 STM1.57 STM1.58 STM1.59 STM1.60 STM1.61 STM1.62 U1.5 U2.5 Y1.4

## Polygon pours and split planes (outlines as drawn)
no net on Bottom Layer "Bottom Layer-No Net" (solid, shelved, pour order 4): 580,5180 585,5185 7355,5185 7205,5035 7205,675 7075,805 540,805

## Text inside footprints (layer, text, board x,y; h text height)
P1: Top Overlay "GND" at 6810.04,3608.19 h30; Top Overlay "VCC" at 6479.33,3612.13 h30; Top Overlay "RST" at 6810.04,3308.19 h30; Top Overlay "CLK" at 6806.1,3407.4 h30; Top Overlay "IO" at 6810.04,3509.76 h30; Top Overlay "RTS" at 6482.28,3301.1 h30; Top Overlay "RX" at 6510.91,3407.4 h30; Top Overlay "TX" at 6510.91,3509.76 h30